# Altium PCB rtc.PcbDoc
Units mm, origin at the board's own origin, x right, y up, seen from the top; angles counter-clockwise.
Board outline 36.89 x 35.2 mm, 2 copper layers (Top Layer, Bottom Layer), stack 1.671 mm thick; 12 components, 11 nets, 57 pads, 19 vias.
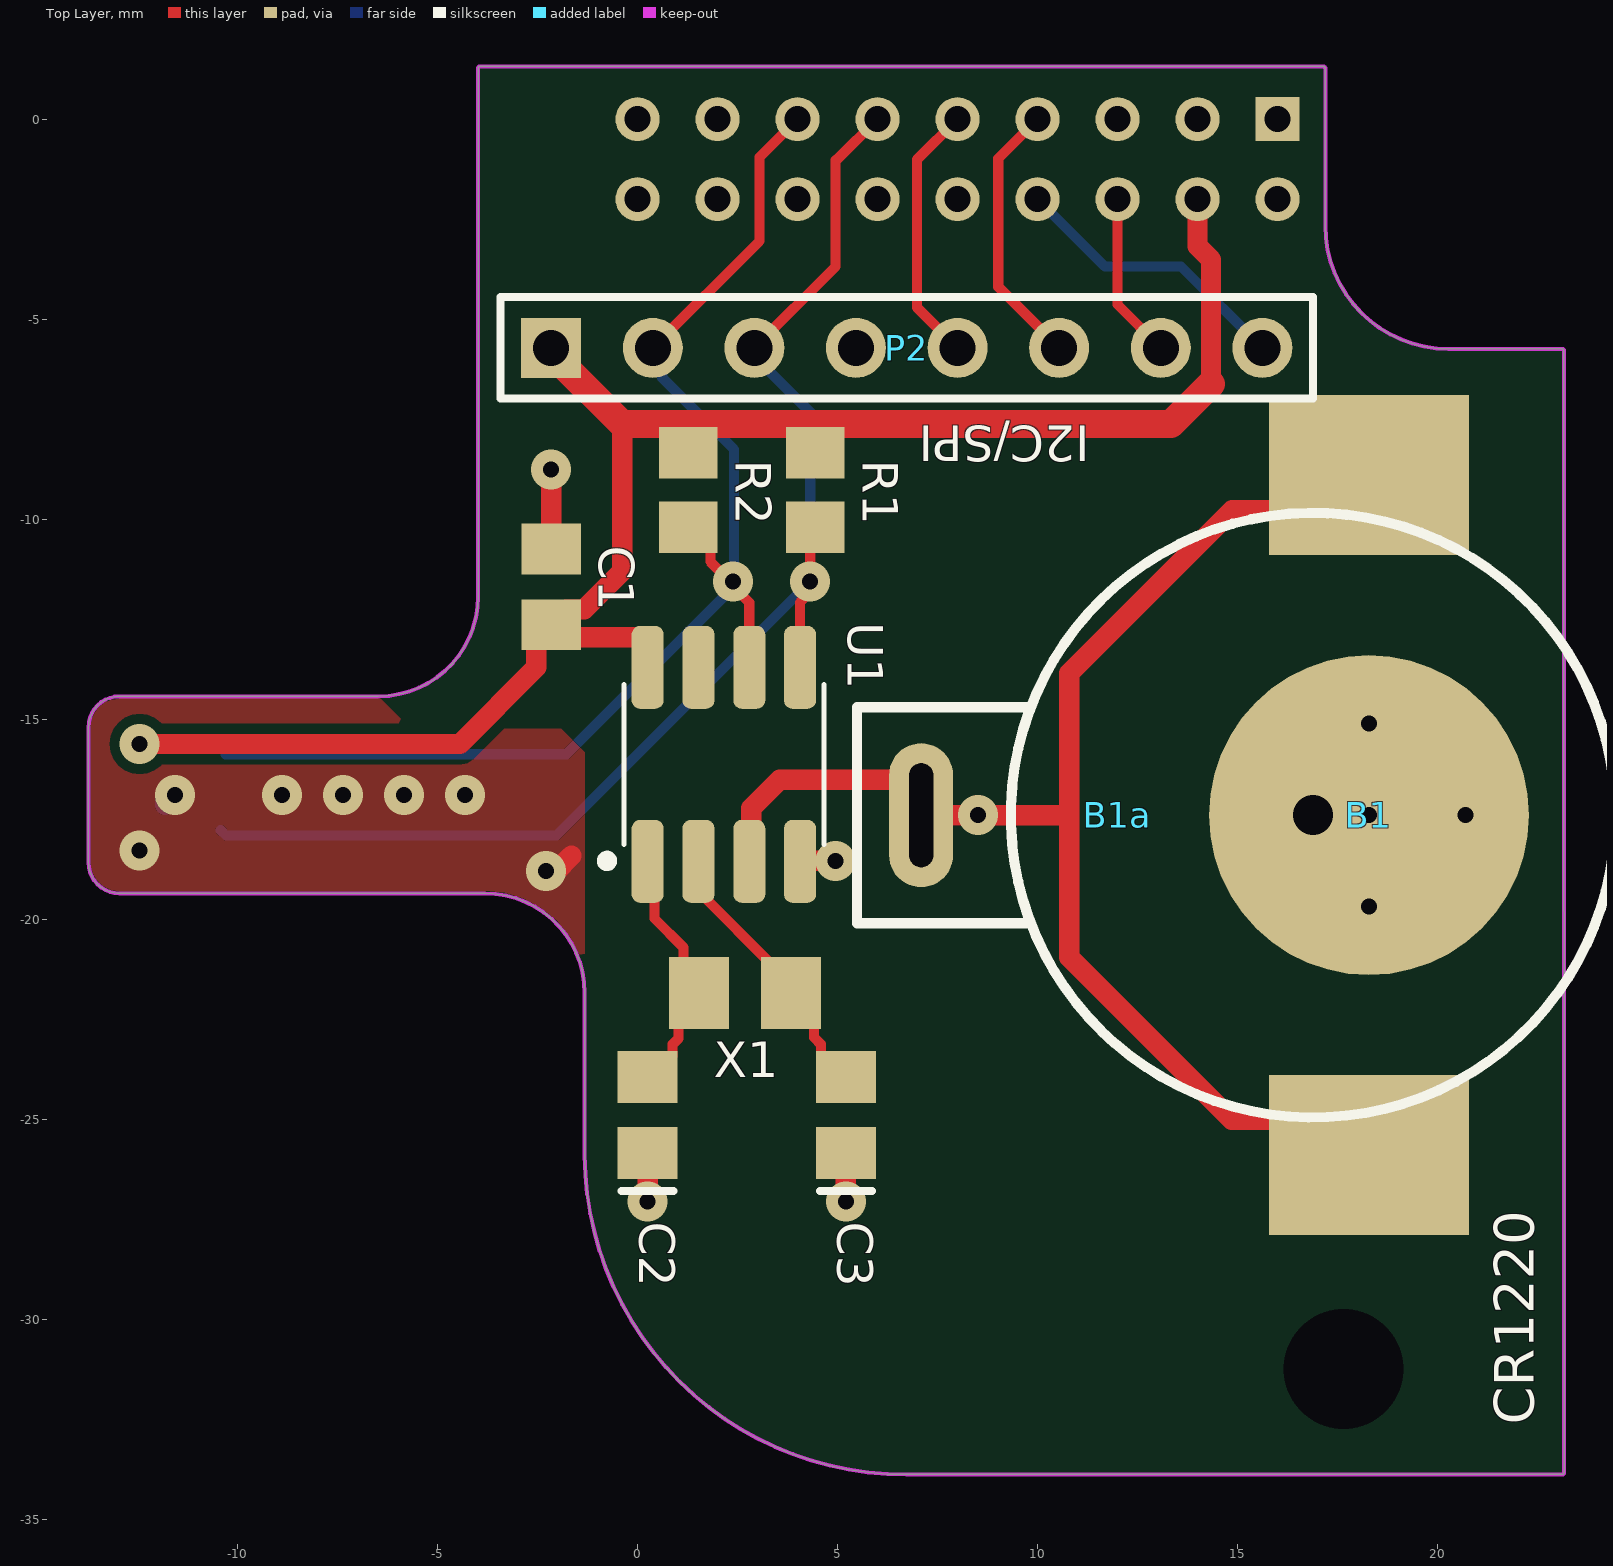
[diagram p0: Top Layer view]
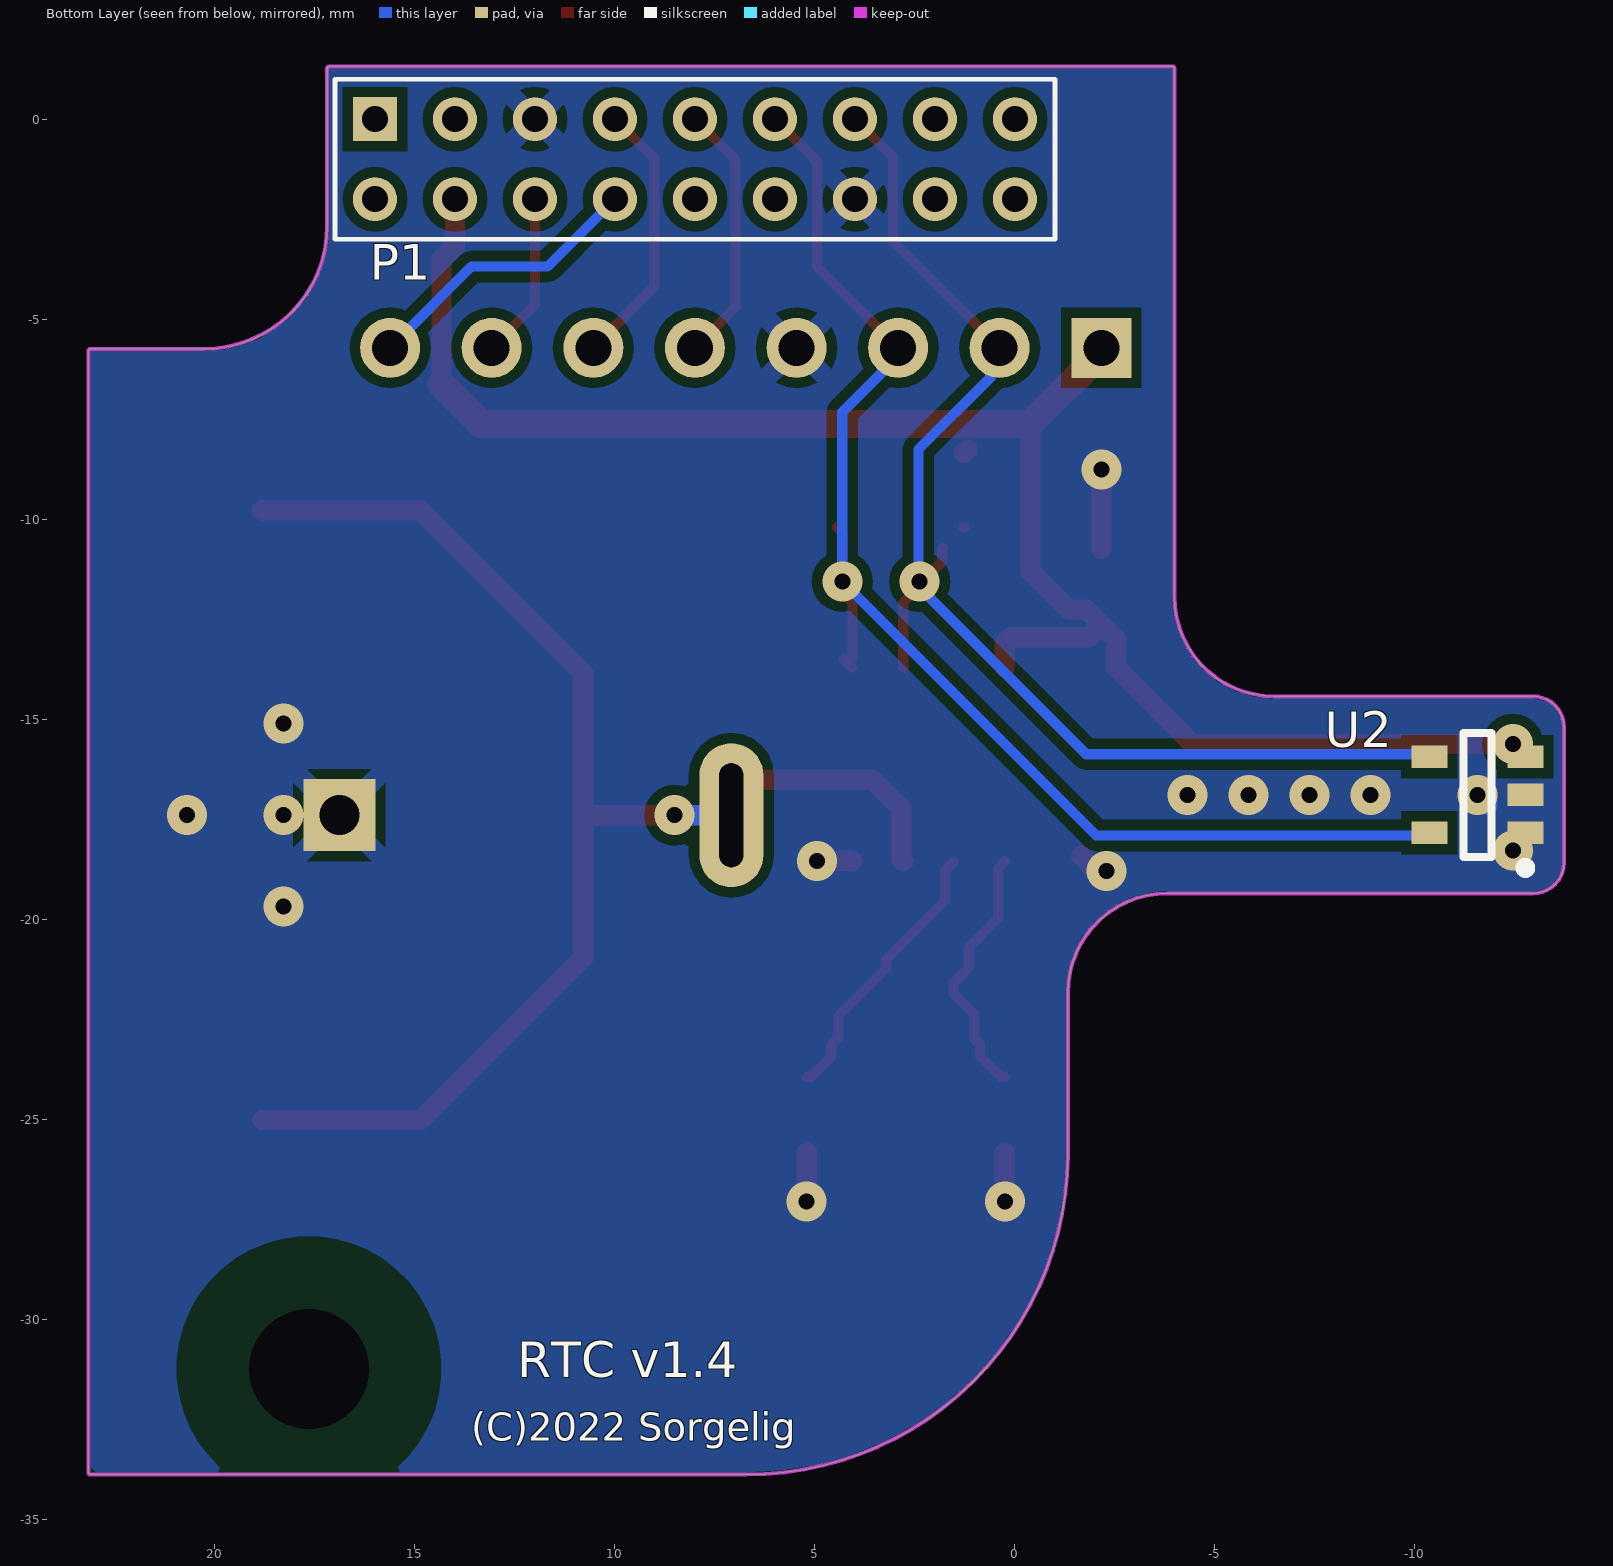
[diagram p1: Bottom Layer view, seen from below]
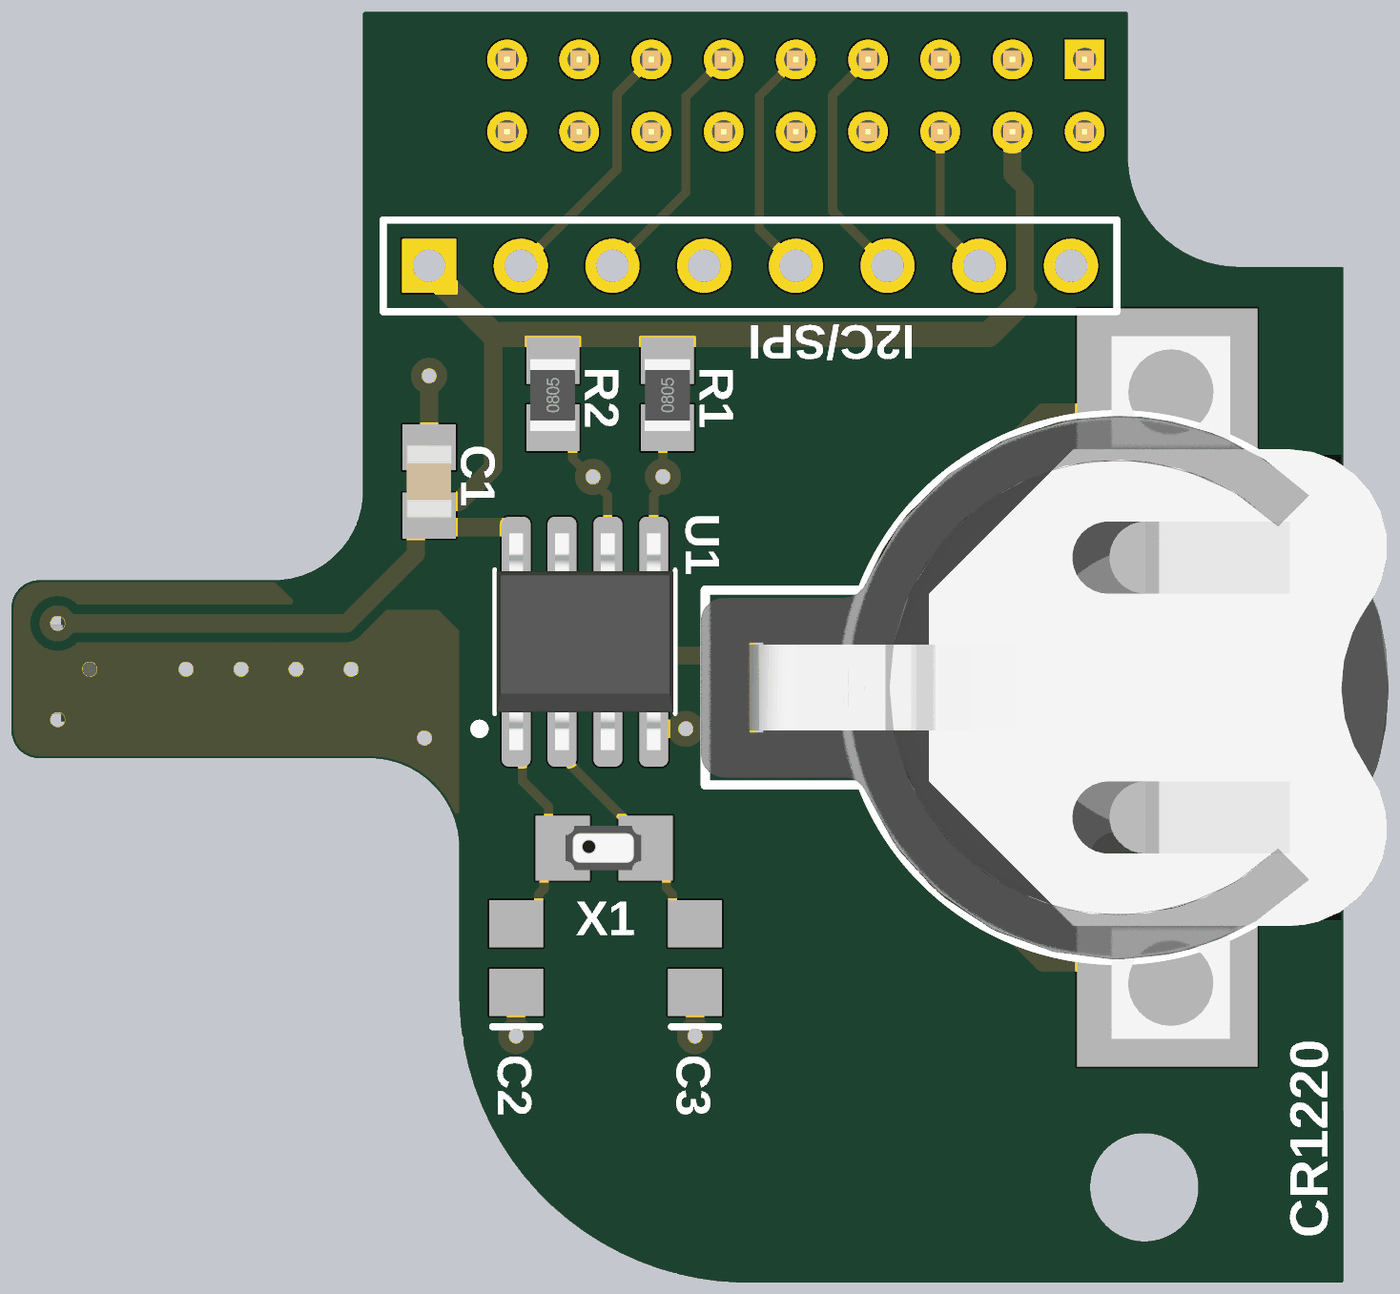
[diagram p2: 3D render of the assembled board from above, using the file's embedded part models]

## Layer stack, top to bottom
Top Solder: solder mask 0.0102, Solder Resist, Dk 3.5
Top Layer: signal copper 0.0356
Dielectric 1: dielectric 1.6, FR-4, Dk 4.8
Bottom Layer: signal copper 0.0356
Bottom Solder: solder mask 0.0102, Solder Resist, Dk 3.5

## Board outline
-1.32,-25.908 -1.32,-21.844 ccw(c-3.81,-21.844) -3.81,-19.354 -12.954,-19.354 cw(c-12.954,-18.582) -13.727,-18.582 -13.727,-15.2 cw(c-12.954,-15.2) -12.954,-14.428 -6.477,-14.428 ccw(c-6.477,-11.938) -3.987,-11.938 -3.987,1.269 cw(c-3.937,1.269) -3.937,1.319 17.145,1.319 cw(c17.145,1.269) 17.195,1.269 17.195,-2.667 ccw(c20.271,-2.667) 20.271,-5.743 23.112,-5.743 cw(c23.112,-5.793) 23.162,-5.793 23.163,-33.832 cw(c23.113,-33.832) 23.113,-33.882 6.73,-33.882 cw(c6.692,-25.87)

## Design rules (kind name [scope] priority, off if disabled: settings)
BoardOutlineClearance [All] p1: gap=0 ignorepadtopadclearanceinfootprint=FALSE
Clearance keep-out_clearance [InNamedPolygon('ground') vs OnLayer('Keep-Out Layer')] p1: gap=0 ignorepadtopadclearanceinfootprint=FALSE
Clearance [All] p2: gap=0.254 ignorepadtopadclearanceinfootprint=TRUE except(0: Arc-Hole Track-Hole SMDPad-Hole THPad-Hole Via-Hole Fill-Hole Poly-Hole Region-Hole Text-Hole)
ComponentClearance [All] p1 off: gap=0.254 collisioncheckmode=3 verticalgap=0.254 showdistances=FALSE
DiffPairsRouting [All] p1: maxlimit=0.254 minlimit=0.254 mostfreqgap=0.254 substack1={5FC4F890-FC4C-4B15-9ADF-B3BB21DC8AD9} toplayer_{5fc4f890-fc4c-4b15-9adf-b3bb21dc8ad9}_minwidth=0.381 toplayer_{5fc4f890-fc4c-4b15-9adf-b3bb21dc8ad9}_maxwidth=0.381 toplayer_{5fc4f890-fc4c-4b15-9adf-b3bb21dc8ad9}_prefwidth=0.381 bottomlayer_{5fc4f890-fc4c-4b15-9adf-b3bb21dc8ad9}_minwidth=0.381 bottomlayer_{5fc4f890-fc4c-4b15-9adf-b3bb21dc8ad9}_maxwidth=0.381 bottomlayer_{5fc4f890-fc4c-4b15-9adf-b3bb21dc8ad9}_prefwidth=0.381 toplayer_minwidth=0.381 toplayer_maxwidth=0.381 toplayer_prefwidth=0.381 bottomlayer_minwidth=0.381 bottomlayer_maxwidth=0.381 bottomlayer_prefwidth=0.381 substack2={1C550BE1-56C3-4E1D-A89B-8C6B867F7131} toplayer_{1c550be1-56c3-4e1d-a89b-8c6b867f7131}_minwidth=0.381 toplayer_{1c550be1-56c3-4e1d-a89b-8c6b867f7131}_maxwidth=0.381 toplayer_{1c550be1-56c3-4e1d-a89b-8c6b867f7131}_prefwidth=0.381 bottomlayer_{1c550be1-56c3-4e1d-a89b-8c6b867f7131}_minwidth=0.381 bottomlayer_{1c550be1-56c3-4e1d-a89b-8c6b867f7131}_maxwidth=0.381 bottomlayer_{1c550be1-56c3-4e1d-a89b-8c6b867f7131}_prefwidth=0.381 maxuncoupledlength=12.7
Height [All] p1 off: minheight=0 maxheight=25.4 prefheight=12.7
HoleSize [All] p1: absolutevalues=TRUE maxlimit=6 minlimit=0.025 maxpercent=80.000 minpercent=20.000
MinimumSolderMaskSliver [All] p1: minsoldermaskwidth=0.25
PolygonConnect PolygonConnect_1 [HasFootprint('SOT23-5') or IsVia] p1: connectstyle=Direct reliefconductorwidth=0.762 reliefentries=4 polygonreliefangle="90 Angle" airgapwidth=0.254
PolygonConnect [not IsVia] p2: connectstyle=Relief reliefconductorwidth=0.5 reliefentries=4 polygonreliefangle="45 Angle" airgapwidth=0.254
RoutingVias [All] p1: holewidth=0.4 width=1 viastyle="Through Hole" minholewidth=0.4 minwidth=1 maxholewidth=0.4 maxwidth=1
SilkToSolderMaskClearance [IsPad] p1 off: minsilkscreentomaskgap=0.127 clearancetoexposedcopper=TRUE
SolderMaskExpansion SolderMaskExpansion_U1 [InComponent('U1')] p1: expansion=0 istentingtop=FALSE
SolderMaskExpansion [All] p2: expansion=0.051 istentingtop=FALSE
Width Width_power [InNetClass('power')] p1: maxlimit=2 minlimit=0.254 preferedwidth=0.508 substack1={5FC4F890-FC4C-4B15-9ADF-B3BB21DC8AD9} substack2={1C550BE1-56C3-4E1D-A89B-8C6B867F7131} minimp=50.000000 maximp=50.000000 favimp=50.000000
Width Width_signal [All] p2: maxlimit=0.254 minlimit=0.254 preferedwidth=0.254 substack1={5FC4F890-FC4C-4B15-9ADF-B3BB21DC8AD9} substack2={1C550BE1-56C3-4E1D-A89B-8C6B867F7131}
24 further rules are at their usual default settings.

## Classes and differential pairs
net class power: BAT GND VCC

## Components (designator, comment, footprint, x,y, rotation, side; value= is the part's Value field where it differs from the comment)
B1 "*" KS3000 18.287,-17.399 r270 top locked
B1a "BAT" BAT 16.891,-17.399 r90 top locked
C1 "C0805" C0805 -2.159,-11.691 r270 top value=10uF
C2 "C0805" 0805 0.254,-24.892 r90 top value=9pF
C3 "C0805" 0805 5.207,-24.892 r90 top value=9pF
P1 "LTC" hdr9x2 16,0 r180 bottom locked
P2 "I2C/SPI" HDR1X8 -2.159,-5.715 r0 top locked
R1 "4.7K" R0805 4.445,-9.271 r90 top
R2 "4.7K" R0805 1.27,-9.271 r90 top
U1 "M41T81/MCP79400" SOIC8P 2.159,-16.129 r0 top
U2 "AD7415-0/AD7414-0/TC74A1-3.3V" SOT23-5 -11.557,-16.891 r0 bottom
X1 "FC-12M/FC-135R (32768 Hz)" OSC 2.667,-21.844 r0 top

## Footprints (in the part's own frame and the unit in brackets; to place one, negate y for a bottom-side part, rotate by r counter-clockwise, add the part's x,y. Pads: shape width x height; smd on the part's side, far side on the other; paste and mask are expansions set on the pad)
0805 [mm] "Chip Capacitor; Body 2.0 x 1.2 mm (LxW typ)"
  rect 1.3x1.5 smd: 1(-0.95,0) 2(0.95,0)
  silkscreen extent -1.9,-0.65 -1.9,0.65
BAT [mm] "DIPS, 9.80 mm lead span, 0.00 mm pitch; 2 pin, 15.10 mm L X 14.00 mm W X 7.90 mm H body"
  rect 1.8x1.8 hole 1: 1(0,0)
  oval 3.6x1.6 hole 0.6 slot 2.6 at 0 deg: 2(0,9.8)
  silkscreen extent -7.56,-7.56 7.56,11.4, body extent -7.53,-7.53 7.53,11.52, height 4.57
C0805 [mm] "Capacitor, Chip; 2.35 mm L X 1.35 mm W X 1.00 mm H body"
  rect 1.27x1.48 smd: 1(-0.945,0) 2(0.945,0)
  body extent -1,-0.62 1,0.63, height 0.58
HDR1X8 [mm] "Connector; Header; 8 Position"
  rect 1.5x1.5 hole 0.9: 1(0,0)
  round 1.5 hole 0.9: 2(2.54,0) 3(5.08,0) 4(7.62,0) 5(10.16,0) 6(12.7,0) 7(15.24,0) 8(17.78,0)
  silkscreen extent -1.27,-1.27 19.05,1.27
hdr9x2 [mm] "Header, Vertical Receptacle, 2.00 mm pitch; 0.50 mm lead width, 18 pins, 2 rows, 9 pins per row, 18.00 mm L X 4.00 mm W X 4.35 mm H body"
  rect 1.1x1.1 hole 0.65 paste-1.1: 1(0,0)
  round 1.1 hole 0.65 paste-1.1: 2(0,-2) 3(2,0) 4(2,-2) 5(4,0) 6(4,-2) 7(6,0) 8(6,-2) 9(8,0) 10(8,-2) 11(10,0) 12(10,-2) 13(12,0) 14(12,-2) 15(14,0) 16(14,-2) 17(16,0) 18(16,-2)
  silkscreen extent -1,-3 17,1, body extent -1,-3 17,1, height 4.35
KS3000 [mm]
  round 8 smd: 1(0,0)
  rect 4x5 smd: 2(-8.5,0) 2(8.5,0)
  body extent -9.73,-6.6 9.73,6.1, height 3.21
OSC [mm] "Oscillator, Corner Concave; 2.10 mm L X 1.225 mm W X 0.60 mm H body"
  rect 1.5x1.8 smd: 1(-1.126,0) 2(1.174,0)
  body extent -1.05,-0.61 1.05,0.61, height 0.6
R0805 [mm] "Resistor, Chip; 2.32 mm L X 1.25 mm W X 1.00 mm H body"
  rect 1.29x1.47 smd: 1(-0.93,0) 2(0.93,0)
  body extent -1.03,-0.62 0.97,0.63, height 0.42
SOIC8P [mm] "Small Outline IC (SOIC), 1.27 mm pitch; 8 pin, 4.90 mm L X 3.90 mm W X 1.75 mm H body"
  rrect51% 0.8x2.07 smd: 1(-1.905,-2.425) 2(-0.635,-2.425) 3(0.635,-2.425) 4(1.905,-2.425) 5(1.905,2.425) 6(0.635,2.425) 7(-0.635,2.425) 8(-1.905,2.425)
  silkscreen extent -3.05,-2.54 2.5,2, body extent -2.45,-3 2.45,3, height 1.75
SOT23-5 [mm] "SOT23, 5-Leads, Body 2.9x1.6mm, Pitch 0.95mm, Lead Span 2.7mm, IPC High Density"
  rect 0.9x0.56 smd mask+0.051: 1(-1.2,0.95) 2(-1.2,0) 3(-1.2,-0.95) 4(1.2,-0.95) 5(1.2,0.95)
  silkscreen extent -1.32,-1.55 0.35,1.95, body extent -1.41,-1.45 1.41,1.45, height 1.4

## Part data
B1: library part BAT_KS3000
C1 C2 C3: "Ceramic Chip Capacitor - Standard", PackageDocument=Mar-2001, Code_IPC=2012[0805], Code_JEITA=0805, ComponentLink1Description="Manufacturer Link", ComponentLink1URL=http://www.kemet.com/, ComponentLink2Description=Datasheet, ComponentLink2URL=http://www.kemet.com/kemet/web/homepage/kechome.nsf/vapubfilesname/F3102TA.pdf/$file/F3102TA.pdf, DatasheetDocument=Mar-2001, LatestRevisionDate=19-Mar-2004, LatestRevisionNote="Silkscreen size reduced.", Note="Footprint corresponds to dimensions for bulk cassette packaging. This case size has tightened tolerances.", PackageReference=0805, Published=17-Jul-2002, Publisher="Altium Limited"
P1: library part HDR9x2
P2: library part "Header 8", "Header, 8-Pin", LatestRevisionDate=17-Jul-2002, LatestRevisionNote="Re-released for DXP Platform.", Publisher="Altium Limited"
R1 R2: library part ERJ6RS, "Low Ohmic Value Thick Film Chip Resistor, 0.1 Ohm to 0.2 Ohm Range, 1%, 2% and 5% Tolerance, 0805 Size, 0.125 W", PackageDocument=Mar-2003, Code_IPC="2012 [0805]", ComponentLink1Description="Manufacturer Link", ComponentLink1URL=http://www.panasonic.com/industrial/components/resistive_products.htm, ComponentLink2Description=Datasheet, ComponentLink2URL=http://www.panasonic.com/industrial/components/pdf/AOA0000CE3.pdf, LatestRevisionDate=19-Mar-2004, LatestRevisionNote="Silkscreen size reduced.", PackageReference=6-0805, Published=17-Dec-2003, Publisher="Altium Limited"
U1: library part M41T
U2: library part AD7415
X1: library part OSC

## Free pads (board coordinates)
  round 0 hole 3 unplated mask-3: ""(17.652,-31.242)

## Via types
v1: diameter 1, hole 0.4, Top Layer to Bottom Layer, tented both sides, 15 vias
v2: diameter 1, hole 0.4, Top Layer to Bottom Layer, tented bottom, 4 vias

## Nets (pads, with @x,y where several pads share a name; then routed paths per layer and width w, separated by ;. In a path a pad name is that pad's centre, name@x,y a point inside that pad or via, vN(x,y) a via of type N, cw(c..) or ccw(c..) an arc to the next point about the centre after c; other vN are vias at no path point)
BAT: B1.2 B1a.2 U1.3 | length 38.6
  Top Layer w0.508: U1.3 2.842,-18.506 2.842,-17.224 3.556,-16.51 6.587,-16.51 7.091,-17.014 B1a.2 v1(8.509,-17.399) ; B1a.2@6.604,-17.399 B1a.2@6.837,-17.399 ; v1@8.509,-17.145 8.763,-17.399 10.795,-17.399 ; B1.2@18.819,-25.019 14.859,-25.019 10.795,-20.955 10.795,-17.399 ; B1.2@18.819,-9.779 14.868,-9.779 10.795,-13.852 10.795,-17.399
  Bottom Layer w0.508: B1a.2@6.985,-17.399 B1a.2 v1(8.509,-17.399)
GND: B1.1 B1a.1 C1.1 C2.1 C3.1 P1.5 P1.14 P2.4 U1.4 U2.1 U2.2 | length 6.2
  Top Layer w0.508: v1(-2.286,-18.796) -2.032,-18.796 -1.651,-18.415 ; C1.1 v1(-2.159,-8.763) ; v1(0.254,-27.051) C2.1 ; U1.4 4.076,-18.542 v1(4.953,-18.542) ; v1(5.207,-27.051) C3.1
  Bottom Layer w0.508: v1@-11.811,-17.145 v1@-11.811,-17.018
  other v1: -12.446,-18.288 -11.557,-16.891 -8.89,-16.891 -7.366,-16.891 -5.842,-16.891 -4.318,-16.891
  other v2: 18.287,-19.685 18.287,-17.399 20.7,-17.399 18.287,-15.113
MISO: P1.7 P2.6 | length 6.8
  Top Layer w0.254: P1.7 9.017,-0.983 9.017,-4.191 P2.6
MOSI: P1.9 P2.5 | length 6.6
  Top Layer w0.254: P1.9 6.985,-1.015 6.985,-4.699 P2.5
NetC2_2: C2.2 U1.1 X1.1 | length 6.5
  Top Layer w0.254: C2.2 0.354,-23.942 0.877,-23.419 0.877,-23.126 1.027,-22.976 1.027,-22.358 X1.1 1.541,-21.607 1.397,-21.463 1.154,-21.22 1.154,-20.712 0.425,-19.983 0.425,-18.725 U1.1
NetC3_2: C3.2 U1.2 X1.2 | length 7
  Top Layer w0.254: U1.2 1.749,-18.779 1.749,-19.529 3.218,-20.998 3.218,-21.221 4.412,-22.415 4.412,-22.954 4.584,-23.126 4.584,-23.419 5.107,-23.942 C3.2
SCK: P1.6 P2.7 | length 4.2
  Top Layer w0.254: P1.6 12,-4.634 P2.7
SCL: P1.13 P2.2 R2.1 U1.6 U2.4 | length 32
  Top Layer w0.254: P2.2 3.048,-3.048 3.048,-0.952 P1.13 P1.13@4,-0.064 ; R2.1 R2.1@1.287,-10.201 ; R2.1@1.805,-10.719 1.821,-10.719 1.821,-11.061 2.321,-11.562 v1(2.382,-11.562) 2.382,-11.671 2.794,-12.083 U1.6
  Bottom Layer w0.254: U2.4@-10.296,-15.875 -1.778,-15.875 2.382,-11.715 v1(2.382,-11.562) 2.413,-11.531 2.413,-8.255 0.619,-6.461 0.619,-5.953 P2.2
SDA: P1.11 P2.3 R1.1 U1.5 U2.5 | length 34.2
  Top Layer w0.254: P2.3 4.953,-3.683 4.953,-1.016 4.984,-1.016 P1.11 ; U1.5 U1.5@4.289,-13.479 ; U1.5@4.064,-13.462 4.064,-12.079 4.175,-11.968 4.175,-11.7 v1(4.318,-11.557) ; v1@4.255,-11.493 4.318,-11.43 4.318,-10.328 R1.1
  Bottom Layer w0.254: U2.5@-10.419,-17.775 -10.287,-17.907 -2.032,-17.907 v1(4.318,-11.557) ; P2.3 2.921,-5.928 4.318,-7.325 v1@4.318,-11.217
SS: P1.8 P2.8 | length 7.2
  Bottom Layer w0.254: P1.8 11.683,-3.683 13.589,-3.683 P2.8
VCC: C1.2 P1.4 P2.1 R1.2 R2.2 U1.8 U2.3 | length 43.9
  Top Layer w0.508: v1(-12.446,-15.621) -4.445,-15.621 -2.528,-13.704 -2.528,-13.005 C1.2 ; P2.1@-2.159,-5.842 P2.1 ; -0.381,-7.62 -0.381,-11.303 -1.333,-12.255 -1.778,-12.255 C1.2 ; U1.8 0.254,-13.1 0.108,-12.954 -1.841,-12.954 C1.2 ; 0.34,-7.661 0.381,-7.62 ; R2.2@1.184,-8.255 R2.2 ; 5.166,-7.661 5.207,-7.62 ; P1.4 14,-3.175 14.339,-3.514 14.339,-6.616
  Top Layer w0.7: P2.1@-2.159,-5.842 -0.381,-7.62 0.381,-7.62 5.207,-7.62 13.335,-7.62 14.339,-6.616
pads on no net: P1.1 P1.2 P1.3 P1.10 P1.12 P1.15 P1.16 P1.17 P1.18 U1.7

## Polygon pours and split planes (outlines as drawn)
GND on Top Layer "ground" (solid, remove dead copper, pour order 25): -6.477,-14.428 -5.665,-15.24 -1.909,-15.24 -1.32,-15.829 -1.32,-21.849 ccw(c-3.81,-21.844) -3.81,-19.354 -12.954,-19.354 cw(c-12.954,-18.582) -13.727,-18.582 -13.727,-15.2 cw(c-12.954,-15.2) -12.954,-14.428
GND on Bottom Layer "ground" (solid, remove dead copper, pour order 26): -1.32,-25.908 -1.32,-21.844 ccw(c-3.81,-21.844) -3.81,-19.354 -12.954,-19.354 cw(c-12.954,-18.582) -13.727,-18.582 -13.727,-15.2 cw(c-12.954,-15.2) -12.954,-14.428 -6.477,-14.428 ccw(c-6.477,-11.938) -3.987,-11.938 -3.987,1.269 cw(c-3.937,1.269) -3.937,1.319 17.145,1.319 cw(c17.145,1.269) 17.195,1.269 17.195,-2.667 ccw(c20.271,-2.667) 20.271,-5.743 23.112,-5.743 cw(c23.112,-5.793) 23.162,-5.793 23.163,-33.832 cw(c23.113,-33.832) 23.113,-33.882 6.73,-33.882 cw(c6.692,-25.87)

## Keep-outs
Keep-Out Layer:
  lines w0.1: -3.987,1.269 cw(c-3.937,1.269) -3.937,1.319 ; -3.987,1.269 cw(c-3.937,1.269) -3.937,1.319 ; -3.987,1.269 -3.987,-11.938 cw(c-6.477,-11.938) -6.477,-14.428 -12.954,-14.428 ccw(c-12.954,-15.2) -13.727,-15.2 -13.727,-18.582 ccw(c-12.954,-18.582) -12.954,-19.354 -3.81,-19.354 cw(c-3.81,-21.844) -1.32,-21.844 -1.32,-25.908 ; -3.937,1.319 -1.27,1.319 17.145,1.319 ; -1.32,-25.908 ccw(c6.692,-25.87) 6.73,-33.882 ; -1.32,-25.908 ccw(c-1.27,-25.908) -1.32,-25.908 ; -1.32,-25.908 ccw(c-1.27,-25.908) -1.32,-25.908 ; 6.73,-33.882 23.113,-33.882 ; 6.73,-33.882 6.73,-33.882 ; 17.145,1.319 cw(c17.145,1.269) 17.195,1.269 ; 17.145,1.319 cw(c17.145,1.269) 17.195,1.269 ; 17.195,-2.667 ccw(c20.271,-2.667) 20.271,-5.743 ; 17.195,-2.667 ccw(c17.145,-2.667) 17.195,-2.667 ; 17.195,-2.667 17.195,1.269 ; 17.195,-2.667 17.195,-2.667 ; 17.195,-2.667 17.195,-2.667 ; 20.271,-5.743 ccw(c20.271,-5.793) 20.271,-5.743 ; 20.271,-5.743 23.112,-5.743 ; 20.271,-5.743 20.271,-5.743 ; 20.271,-5.743 20.271,-5.743 ; 23.112,-5.743 cw(c23.112,-5.793) 23.162,-5.793 ; 23.112,-5.743 cw(c23.112,-5.793) 23.162,-5.793 ; 23.113,-33.882 ccw(c23.113,-33.832) 23.163,-33.832 ; 23.113,-33.882 ccw(c23.113,-33.832) 23.163,-33.832 ; 23.163,-33.832 ccw(c23.113,-33.832) 23.163,-33.832 ; 23.163,-33.832 ccw(c23.113,-33.832) 23.163,-33.832 ; 23.163,-33.832 23.162,-5.793 ; 23.162,-5.793 ccw(c23.112,-5.793) 23.162,-5.793

## Other copper
Bottom Layer:
  pour cut-out: 17.652,-34.555 cw(c17.652,-31.242) 14.339,-31.242 cw(c17.652,-31.242) 17.652,-27.929 cw(c17.652,-31.242) 20.965,-31.242 cw(c17.652,-31.242)

## Silkscreen, mask and mechanical layers (free items; w line width, h text height)
Top Overlay:
  text "CR1220" at 22.732,-32.639 h1.7 r90
Bottom Overlay:
  text "RTC v1.4" at 12.446,-31.75 h1.52
  text "(C)2022 Sorgelig" at 13.589,-33.274 h1.2